# Altium PCB ArgoFC.PcbDoc (part 5 of 5)
Units mm, origin at the board's own origin, x right, y up, seen from the top; angles counter-clockwise.
Board outline 177.8 x 177.8 mm, 4 copper layers (Top Layer, GND Plane, PWR Plane, Bottom Layer), stack 0.603 mm thick; 373 components, 236 nets, 1289 pads, 686 vias.
Unrouted connection lines stored in the file: 16.
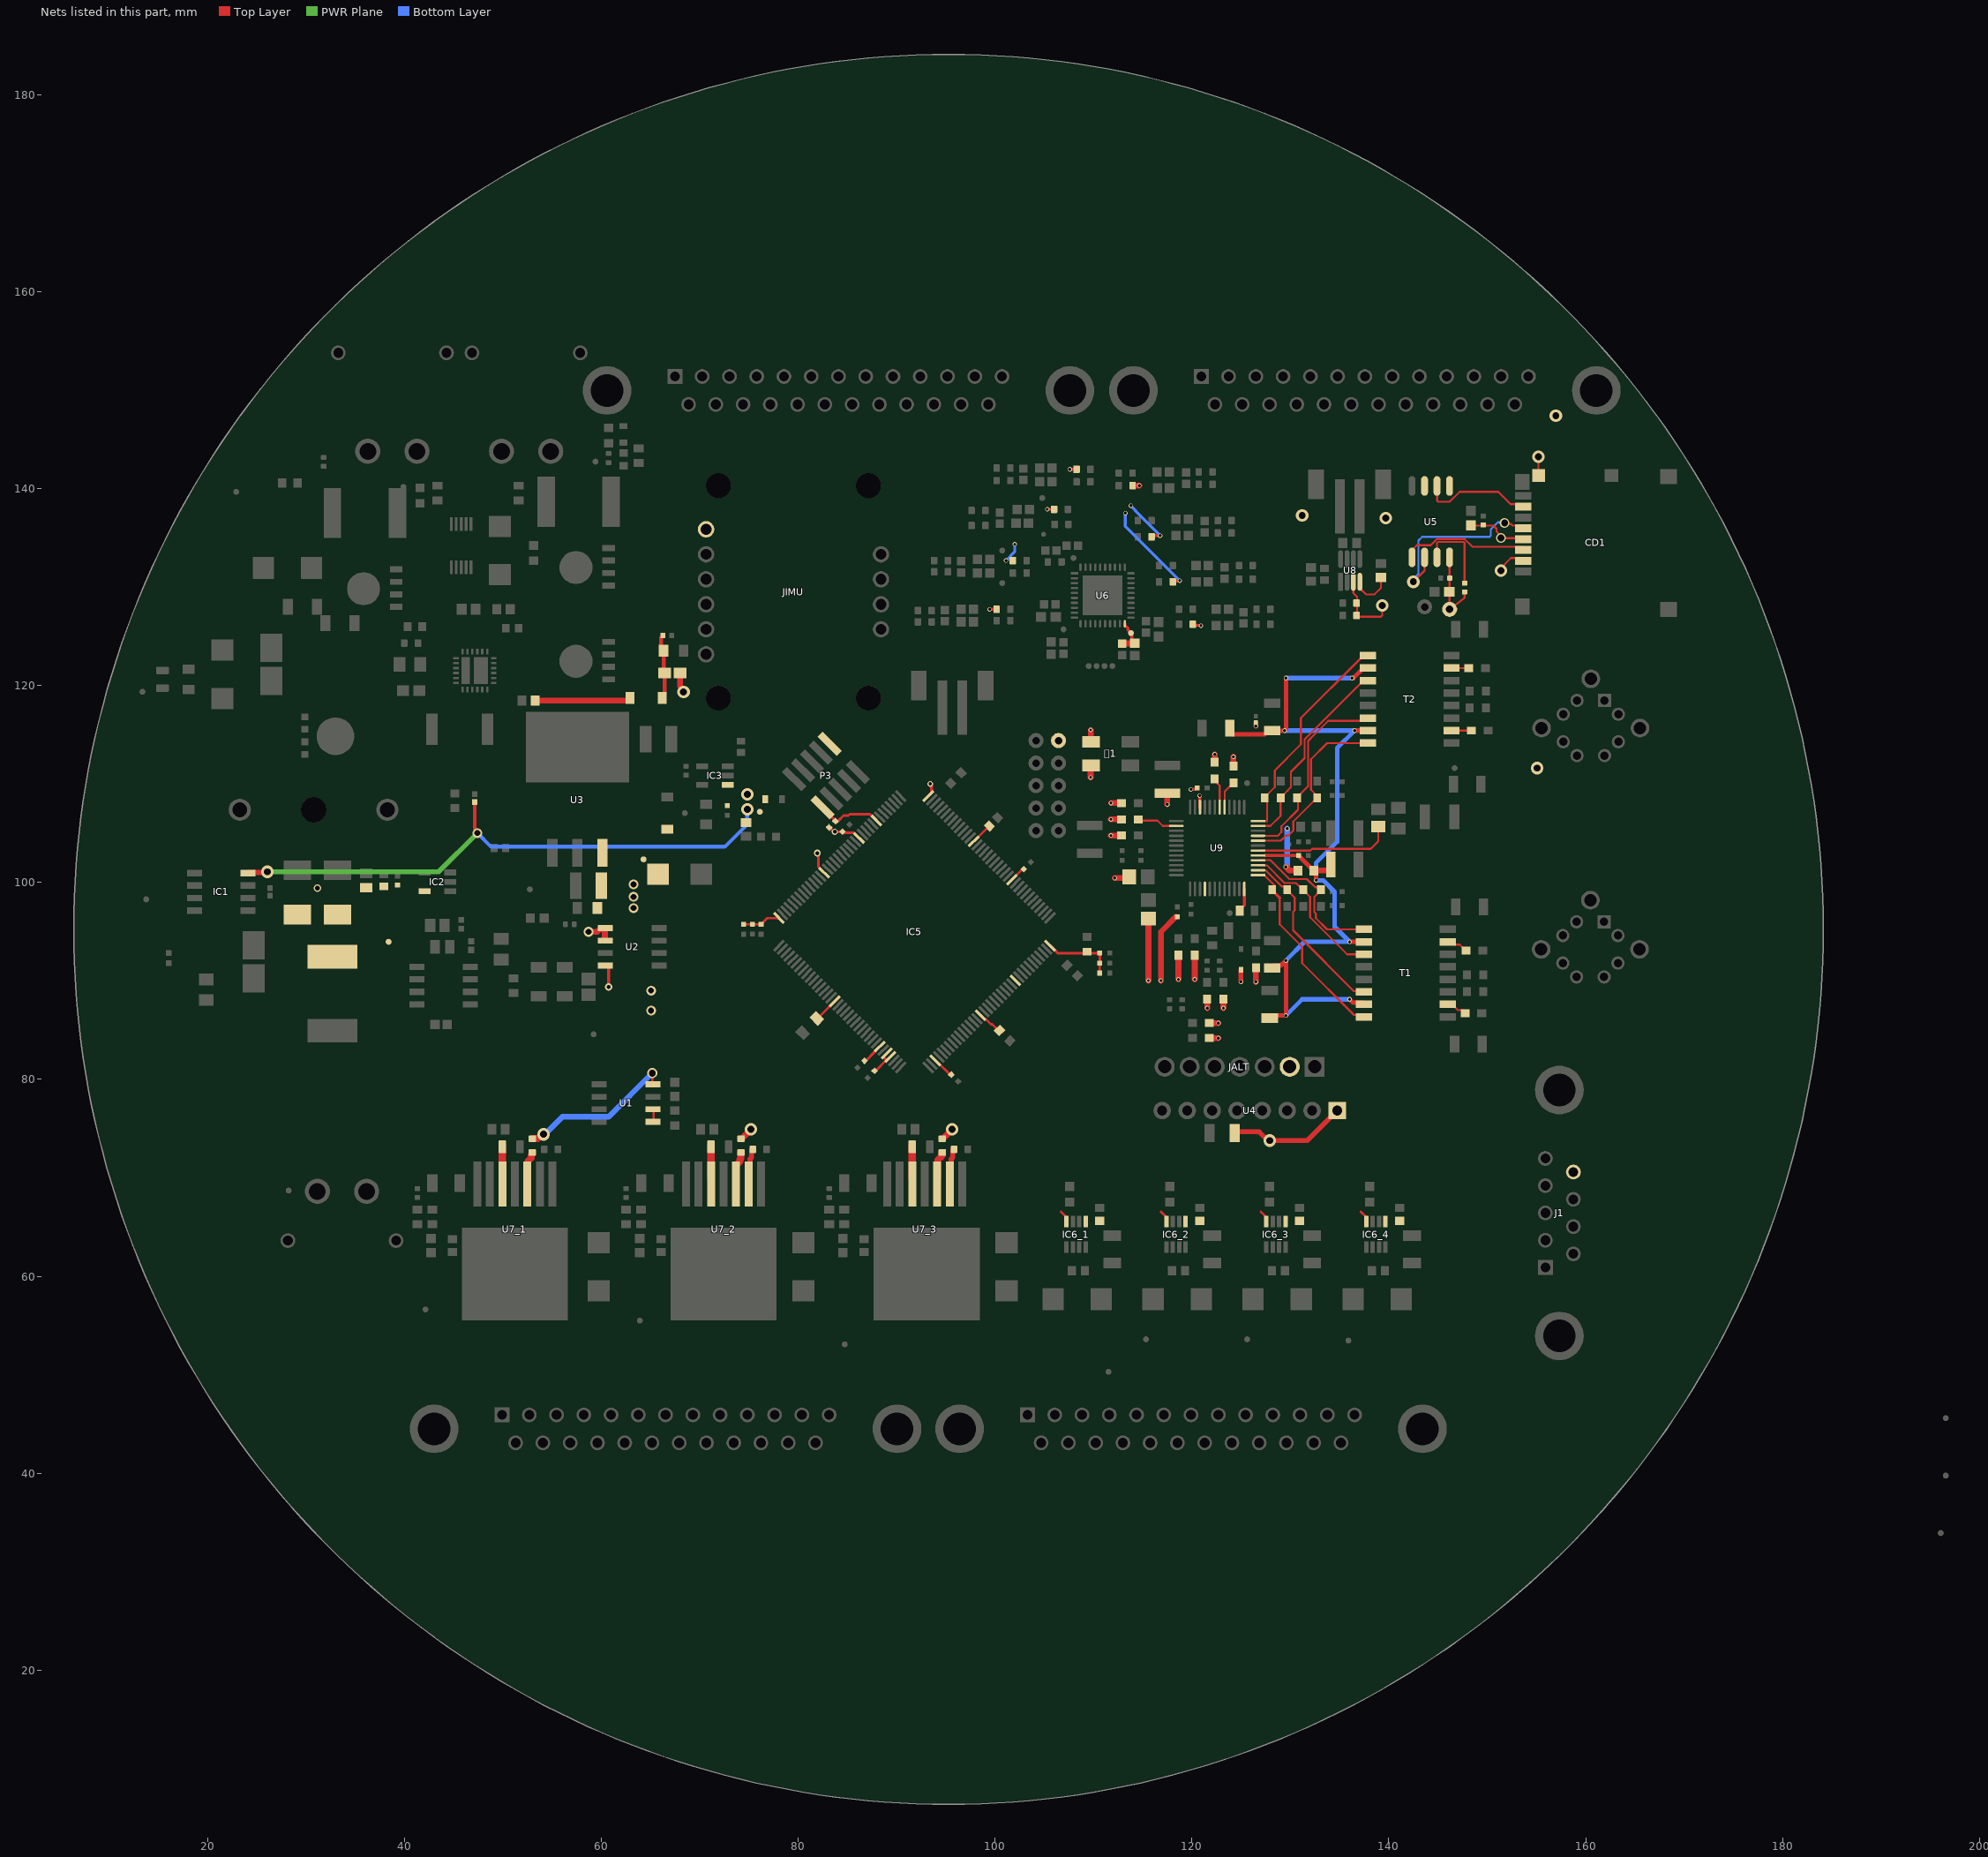
[diagram p6: the nets of this part, all layers, seen from the top]

## Via types
v1: diameter 0.5, hole 0.25, Top Layer to Bottom Layer, 327 vias
v2: diameter 0.45, hole 0.3, Top Layer to Bottom Layer, 147 vias
v3: diameter 1.27, hole 0.711, Top Layer to Bottom Layer, 80 vias
v4: diameter 1, hole 0.6, Top Layer to Bottom Layer, 28 vias
v5: diameter 1, hole 0.7, Top Layer to Bottom Layer, 21 vias
v6: diameter 0.75, hole 0.5, Top Layer to Bottom Layer, 17 vias
v7: diameter 0.5, hole 0.3, Top Layer to Bottom Layer, 15 vias
v8: diameter 0.7, hole 0.4, Top Layer to Bottom Layer, 14 vias
v9: diameter 0.75, hole 0.4, Top Layer to Bottom Layer, 12 vias
v10: diameter 0.6, hole 0.35, Top Layer to Bottom Layer, 7 vias
v11: diameter 0.6, hole 0.3, Top Layer to Bottom Layer, 5 vias
v12: diameter 0.7, hole 0.5, Top Layer to Bottom Layer, 3 vias
v13: diameter 0.6, hole 0.4, Top Layer to Bottom Layer, 2 vias
v14: diameter 2, hole 1.2, Top Layer to Bottom Layer, 2 vias
v15: diameter 7.62, hole 7.62, Top Layer to Bottom Layer, 2 vias
v16: diameter 1, hole 0.5, Top Layer to Bottom Layer, 1 vias
v17: diameter 0.711, hole 0.711, Top Layer to Bottom Layer, 1 vias
v18: diameter 1, hole 0.711, Top Layer to Bottom Layer, 1 vias
v19: diameter 0.3, hole 0.2, Top Layer to Bottom Layer, 1 vias

## Nets (pads, with @x,y where several pads share a name; then routed paths per layer and width w, separated by ;. In a path a pad name is that pad's centre, name@x,y a point inside that pad or via, vN(x,y) a via of type N, cw(c..) or ccw(c..) an arc to the next point about the centre after c; other vN are vias at no path point) (continued)
NetR64_2_2: R64_2.2 U7_2.2 | length 3.4
  Top Layer w0.5: U7_2.2@75.08,69.522 75.08,71.905 75.242,72.067 R64_2.2@75.242,72.898
NetR64_3_2: R64_3.2 U7_3.2 | length 3.4
  Top Layer w0.5: U7_3.2@95.527,69.522 95.527,71.905 95.689,72.067 R64_3.2@95.689,72.898
NetR65_1_2: R65_1.2 U7_1.3 | length 3.6
  Top Layer w0.254: U7_1.3@52.451,68.834 U7_1.3@52.451,69.372
  Top Layer w0.7: U7_1.3@52.451,69.372 52.501,69.422 52.501,71.678 52.832,72.009 R65_1.2@52.832,72.26
NetR65_2_2: R65_2.2 U7_2.3 | length 3.4
  Top Layer w0.7: U7_2.3@73.66,69.372 73.66,71.272 74.053,71.665 74.053,71.87 74.138,71.955 74.138,72.559 74.148,72.559 R65_2.2@74.168,72.579
NetR65_3_2: R65_3.2 U7_3.3 | length 2.8
  Top Layer w0.7: U7_3.3@94.107,69.977 94.157,70.027 94.157,71.805 94.585,72.233 94.585,72.559 94.595,72.559 R65_3.2@94.615,72.579
NetR66_1_2: R66_1.2 U7_1.5 | length 3.3
  Top Layer w0.75: U7_1.5@49.911,69.977 R66_1.2@49.911,73.279
NetR66_2_2: R66_2.2 U7_2.5 | length 3.3
  Top Layer w0.75: U7_2.5@71.12,69.977 R66_2.2@71.12,73.279
NetR66_3_2: R66_3.2 U7_3.5 | length 3.3
  Top Layer w0.75: U7_3.5@91.567,69.977 R66_3.2@91.567,73.279
NetR69_2: R69.2 U8.4 | length 4.4
  Top Layer w0.2: U8.4@137.048,130.556 137.048,129.906 137.668,129.286 138.557,129.286 139.192,129.921 R69.2@139.192,130.999
NetR74_1: R74.1 U9.48 | length 2.1
  Top Layer w0.3: R74.1@125.007,97.409 125.305,97.707 U9.48@125.305,99.354
NetR75_1: R75.1 U9.6 | length 13.3
  Top Layer w0.2: U9.6@126.96,103.255 132.027,103.255 132.206,103.434 138.162,103.434 138.938,104.21 R75.1@138.938,105.156
NetR76_1: R76.1 T1.1 U9.4 | length 16
  Top Layer w0.2: U9.4@126.931,102.284 127.967,102.284 129.892,100.359 131.67,100.359 132.513,99.516 132.885,99.516 R76.1@133.096,99.304 ; R76.1@132.887,99.016 132.419,98.548 132.419,97.01 132.588,96.841 132.588,96.393 133.731,95.25 T1.1@137.477,95.25
  Top Layer w0.3: R76.1@132.887,99.016 133.096,99.225 R76.1@133.096,99.275
NetR77_1: R77.1 T1.6 U9.2 | length 17.3
  Top Layer w0.2: U9.2@126.714,101.247 127.48,101.247 129.102,99.625 R77.1@129.367,99.625 ; R77.1@129.667,99.225 130.429,98.463 130.429,97.166 130.267,97.004 130.267,95.158 130.81,94.615 136.469,88.956 136.752,88.956 136.752,88.673 136.799,88.626 T1.6@136.758,88.626
  Top Layer w0.3: R77.1@129.667,99.225 R77.1@129.667,99.275
NetR78_1: R78.1 T1.8 U9.1 | length 19.4
  Top Layer w0.2: U9.1@126.706,100.755 127.34,100.755 128.397,99.698 R78.1@128.397,99.695 ; 128.905,98.463 128.905,95.758 131.191,93.472 131.191,91.821 136.469,86.543 136.752,86.543 136.842,86.453 136.842,86.17 137.125,86.17 T1.8@137.215,86.08
  Top Layer w0.3: R78.1@128.143,99.225 128.905,98.463
NetR79_1: R79.1 T1.3 U9.3 | length 14.7
  Top Layer w0.2: U9.3@126.706,101.755 127.607,101.755 129.41,99.952 130.553,99.952 R79.1@130.937,99.568 ; R79.1@131.318,99.225 131.995,98.548 131.995,96.478 135.763,92.71 T1.3@136.906,92.71
  Top Layer w0.3: R79.1@131.318,99.225 R79.1@131.318,99.275
NetR82_2: R82.2 U9.18 | length 1.8
  Top Layer w0.2: 122.592,110.052 122.601,110.052 122.809,109.844 U9.18@122.809,108.331
NetR83_2: R83.2 U9.17 | length 1.7
  Top Layer w0.2: U9.17@123.317,108.331 123.317,109.259 R83.2@123.856,109.798
NetR84_1: R84.1 T1.10 | length 2
  Top Layer w0.2: T1.10@145.987,87.63 146.432,87.63 147.021,87.041 147.528,87.041 R84.1@147.701,86.868
NetR86_1: R86.1 T1.15 | length 1.8
  Top Layer w0.2: T1.15@146.558,93.98 146.558,93.854 146.712,93.7 147.208,93.7 147.817,93.091 R86.1@147.867,93.091
NetR89_1: R89.1 T2.6 U9.9 | length 19.1
  Top Layer w0.2: U9.9@126.706,104.755 128.725,104.755 129.088,105.118 129.088,105.72 130.764,107.396 R89.1@130.764,108.412 ; R89.1@130.683,108.674 131.791,109.782 131.791,114.392 132.408,115.009 ; 132.347,114.948 133.832,116.433 137.133,116.433 137.16,116.46 T2.6@137.16,116.586
NetR90_1: R90.1 T2.8 U9.8 | length 19
  Top Layer w0.2: U9.8@126.706,104.255 129.02,104.255 129.54,104.775 129.794,104.775 130.302,105.283 130.302,106.211 132.365,108.274 132.415,108.274 132.715,108.574 R90.1@132.715,108.624 ; R90.1@132.842,108.674 132.08,109.436 132.08,112.522 133.731,114.173 T2.8@137.858,114.173
NetR91_1: R91.1 T2.1 U9.12 | length 20.6
  Top Layer w0.2: U9.12@127.341,106.255 127.615,106.255 ; R91.1@127.381,108.674 128.405,109.698 128.405,111.387 131.064,114.046 131.064,116.713 T2.1@137.133,122.782 ; 127.635,106.275 R91.1@127.635,108.37 ; T2.1@137.133,122.783 T2.1@137.159,122.809
NetR92_1: R92.1 T2.3 U9.11 | length 18.4
  Top Layer w0.2: U9.11@127.341,105.755 127.975,105.755 128.986,106.766 R92.1@128.986,108.274 ; R92.1@129.351,108.974 129.715,109.338 ; 129.715,109.357 130.056,109.698 130.056,111.26 131.445,112.649 131.445,114.555 137.287,120.397 T2.3@137.287,120.523
NetR93_2: R93.2 U9.26 | length 4.3
  Top Layer w0.2: R93.2@114.33,106.299 116.487,106.299 117.031,105.755 U9.26@118.404,105.755
NetR98_1: R98.1 T2.10 | length 1.6
  Top Layer w0.2: T2.10@146.812,115.443 R98.1@148.375,115.443
NetR99_1: R99.1 T2.15 | length 1.7
  Top Layer w0.2: T2.15@146.368,121.793 R99.1@148.082,121.793
Nfault1: IC6_1.4 | length 0.7
  Top Layer w0.254: 106.68,66.548 IC6_1.4@107.188,66.04
Nfault2: IC6_2.4 | length 0.7
  Top Layer w0.254: 116.84,66.548 IC6_2.4@117.348,66.04
Nfault3: IC6_3.4 | length 0.7
  Top Layer w0.254: 127,66.548 IC6_3.4@127.508,66.04
Nfault4: IC6_4.4 | length 0.7
  Top Layer w0.254: 137.16,66.548 IC6_4.4@137.668,66.04
NRST: IC5.116 P3.10 R15.1 | length 6.1
  Top Layer w0.254: P3.10@82.447,107.636 82.447,107.591 83.739,106.299 83.784,106.299 83.864,106.219 83.949,106.219 84.032,106.301 84.076,106.301 84.582,106.807 85.09,106.807 85.217,106.934 87.249,106.934 IC5.116@87.503,106.68
REG_SUPPLY_5V: C9.1 C12.1 C16.2 C17.2 C18.1 C19.1 D3.1 D4.2 IC2.5 L1.2 Rpl1.2 TP3.1 TP7.1 U3.3
  other v4: 63.246,97.409 63.246,98.552 63.246,99.822
  other v6: 31.115,99.441
SD_DET_3.3V: CD1.9 | length 1.6
  Top Layer w0.2: CD1.9@155.067,141.732 155.194,141.859 v3(155.194,143.256)
SD_Hold: Rhold1.2 U5.7 | length 8.4
  Top Layer w0.2: U5.7@144.898,133.046 144.898,134.503 145.015,134.62 147.584,134.62 147.701,134.503 Rhold1.2@147.701,130.429
SDCIO: U5.3
SPI3_CS0_3.3V: U5.1
SPI3_CS1_3.3V: CD1.2 | length 2.9
  Top Layer w0.2: v3(151.384,131.699) 151.384,131.953 152.4,132.969 CD1.2@153.651,132.969
SPI3_MISO_3.3V: CD1.7 U5.2 | length 11.2
  Top Layer w0.2: U5.2@144.907,140.208 144.907,138.801 145.024,138.684 146.177,138.684 147.193,139.7 151.13,139.7 152.383,138.447 153.543,138.447 CD1.7@153.651,138.447 ; CD1.7@153.543,138.43 CD1.7@153.651,138.43
SPI3_MOSI_3.3V: CD1.3 U5.5 | length 13.3
  Top Layer w0.2: U5.5@142.367,132.969 142.367,133.783 142.857,134.273 144.26,134.273 144.895,134.909 147.704,134.909 148.5,134.112 153.67,134.112 CD1.3@153.924,133.858
SPI3_SCLK_3.3V: CD1.5 U5.6 | length 18.5
  Top Layer w0.2: v3(142.494,130.556) 143.637,131.699 U5.6@143.637,132.969 ; v5(151.765,136.525) 151.856,136.434 152.406,136.434 152.569,136.271 CD1.5@152.908,136.271
  Bottom Layer w0.2: v3(142.494,130.556) 142.494,130.846 143.002,131.354 143.002,134.747 143.383,135.128 150.251,135.128 150.368,135.245 150.368,135.89 151.082,136.604 151.686,136.604 v5(151.765,136.525)
STM32VDD: 1.1 1.4 C2.1 C25.1 C26.1 C27.1 C28.1 C29.1 C30.1 C31.1 C32.1 C33.1 C34.1 C35.1 C36.1 C37.1 C38.1 C39.1 C40.1 C48.1 C49.1 C50.1 C51.1 C52_1.2 C52_2.2 C52_3.2 C52_4.2 C61.1 C62.1 C92.1 C93.1 C106.2 C107.1 C108.1 C121.2 CD1.4 D2.2 D5.1 D14.2 FB1.1 IC1.8 IC3.1 IC5.17 IC5.30 IC5.32 IC5.33 IC5.39 IC5.52 IC5.62 IC5.72 IC5.84 IC5.95 IC5.108 IC5.121 IC5.131 IC5.144 IC6_1.1 IC6_2.1 IC6_3.1 IC6_4.1 J1.9 JALT.2 JIMU.1 P3.1 pad.7 pad.9 R13.1 R15.2 R16.1 R24.2 R25.2 R26.2 R27.2 R28.2 R29.2 R30.2 R31.2 R65_1.1 R65_2.1 R65_3.1 R72.1 R73.2 R80.2 R81.2 R82.1 R83.1 R85.1 R93.1 R94.1 R96.1 R97.1 R101.1 R103.1 R104.1 Rhold1.1 Rpg1.1 RT1.2 TP5.1 TP19.1 U1.4 U2.4 U4.1 U5.8 U6.20 U8.3 U9.22 U9.40 | length 223.5
  Top Layer w0.2: 1.1@109.696,111.868 1.1@109.728,111.9 ; v2(109.696,115.513) v2@109.728,115.481 ; R73.2@113.477,100.457 R73.2@113.604,100.584 ; R83.1@124.201,111.853 R83.1@124.206,111.848 ; U8.3@136.398,130.556 136.398,129.413 136.779,129.032 C93.1@136.779,127 ; C93.1@136.685,127 139.202,127 139.319,127.117 v3(139.319,128.143) ; C49.1@146.05,129.413 146.168,129.531 U5.8@146.168,133.046 ; C49.1@146.153,129.286 146.177,129.262 pad.7@146.177,127.762 147.701,128.905 Rhold1.1@147.701,129.529 ; C51.1@148.336,136.283 148.359,136.26 150.633,136.26 150.948,135.945 150.948,135.653 151.384,135.217 v5(151.384,135.001) 153.505,135.001 CD1.4@153.651,135.147
  Top Layer w0.254: 47.117,105.485 47.371,105.231 v4(47.371,105.029) ; U1.4@65.151,79.502 v18@65.151,80.264 ; C36.1@74.422,95.758 76.2,95.758 76.835,96.393 IC5.144@77.978,96.393 ; C38.1@81.407,86.222 81.513,86.328 82.084,86.328 84.074,88.318 IC5.17@84.074,88.392 ; v8@82.042,102.997 82.042,101.6 IC5.131@82.423,101.219 ; R15.2@83.185,105.537 v13@83.566,105.156 ; v13(83.693,105.156) 84.328,105.156 C29.1@84.455,105.283 ; C29.1@84.416,105.068 85.589,105.068 86.119,104.537 IC5.121@86.152,104.537 ; C34.1@86.804,81.852 IC5.30@87.884,82.931 ; C33.1@87.884,80.899 88.9,81.915 88.9,82.042 IC5.32@88.646,82.296 ; IC5.39@94.234,81.661 95.377,80.518 C26.1@95.504,80.518 ; IC5.95@98.044,104.394 C39.1@99.377,105.727 ; IC5.52@98.509,86.523 98.924,86.108 99.06,86.108 99.557,85.611 99.682,85.611 C40.1@100.487,84.806 ; IC5.84@101.981,100.584 102.743,101.346 C25.1@102.87,101.346 ; C32.1@110.617,90.678 110.617,91.44 ; 110.625,91.567 C27.1@110.625,92.837
  Top Layer w0.28: IC5.72@105.58,93.594 106.337,92.837 C37.1@109.347,92.837 ; C37.1@109.347,92.976 109.486,92.837 110.515,92.837 C27.1@110.617,92.735
  Top Layer w0.3: IC5.108@93.368,108.943 93.621,109.196 93.518,109.299 93.518,109.82 93.397,109.941 v10(93.397,110.022) ; v2(99.441,127.762) R25.2@100.138,127.762 ; v2(105.283,137.922) 105.918,137.922 R31.2@106.045,138.049 ; v2(107.569,141.986) R30.2@108.266,141.986 ; U6.20@113.166,126.295 113.166,126.095 113.197,126.065 113.275,126.065 113.481,125.859 113.481,125.675 113.803,125.352 113.803,125.257 113.849,125.21 113.849,125.079 113.896,125.033 113.896,124.575 C62.1@114.173,124.298 ; R28.2@116.058,135.255 v2(116.755,135.255) ; R27.2@118.048,130.556 118.146,130.654 118.716,130.654 v2(118.745,130.683) ; v2(119.888,109.474) 120.431,109.474 120.523,109.566 C108.1@120.523,109.574 ; R26.2@120.162,126.336 120.162,126.238 120.26,126.14 120.875,126.14 v2(120.904,126.111) ; v2(120.777,108.839) 120.805,108.811 U9.22@120.805,107.656
  Top Layer w0.35: 47.117,105.485 C2.1@47.117,108.195 ; v9(60.706,89.408) U2.4@60.706,91.554
  Top Layer w0.5: IC1.8@24.048,100.965 24.112,101.028 25.971,101.028 v3(26.035,101.092) ; R16.1@124.535,74.755 124.613,74.676 126.819,74.676 127.708,73.787 131.699,73.787 134.797,76.885 U4.1@134.797,77.139 ; v2(124.968,89.916) D14.2@124.968,91.147 ; v2(126.492,115.894) C121.2@126.492,116.256
  Top Layer w0.6: Rpg1.1@53.253,118.491 D2.2@62.865,118.491 ; RT1.2@67.974,121.285 67.974,119.913 68.326,119.561 v3(68.326,119.38) ; v2(109.696,110.687) 1.1@109.696,111.868 ; 1.4@109.728,114.3 v2@109.728,115.481 ; v2(111.76,104.775) R85.1@112.881,104.775 ; v2(111.76,106.426) R93.1@112.965,106.426 ; v2@111.799,108.077 R81.2@112.776,108.077 ; v2(112.141,100.457) R73.2@113.477,100.457 ; C61.1@112.903,124.273 112.928,124.298 C62.1@114.173,124.298 ; R29.2@113.954,140.335 v2(114.634,140.335) ; v2(115.57,90.043) R80.2@115.57,96.266 ; v2(116.84,90.043) 116.84,94.996 C107.1@118.372,96.528 ; v2(117.475,107.95) C106.2@117.475,109.09 ; v2(118.618,90.17) R94.1@118.618,92.622 ; v2(120.269,90.17) R96.1@120.269,92.622 ; v2(121.539,87.249) R104.1@121.539,88.177 ; R101.1@121.754,84.201 v2(122.682,84.201) ; R97.1@121.754,85.725 v2(122.682,85.725) ; R82.1@122.301,112.229 v2(122.301,113.03) ; v2(123.19,87.249) R103.1@123.19,88.177 ; R83.1@124.201,111.853 124.206,111.859 v2(124.206,112.775) ; v2(126.492,89.916) R72.1@126.492,91.352 ; v2(129.54,101.6) 129.921,101.219 FB1.1@130.772,101.219
  Top Layer w0.65: R65_2.1@74.231,73.977 v3@75.184,74.93 ; R65_3.1@94.742,74.041 v3@95.631,74.93
  Top Layer w0.7: R65_1.1@52.959,73.979 53.505,73.979 53.948,74.422 v3@54.229,74.422
  PWR Plane w0.5: v3(26.035,101.092) 43.434,101.092 v4(47.371,105.029)
  Bottom Layer w0.3: v2@101.141,132.764 101.981,133.604 v2(101.981,134.366) ; v2(113.228,137.541) 113.228,136.2 v2(118.745,130.683) ; v2(113.792,138.303) 113.792,138.262 114.248,137.806 114.248,137.762 v2(116.755,135.255)
  Bottom Layer w0.4: v4(47.371,105.029) 48.768,103.632 72.517,103.632 74.803,105.918 v3(74.803,107.442)
  Bottom Layer w0.6: v3@54.229,74.422 56.007,76.2 60.706,76.2 v18(65.151,80.645) ; v2(129.54,101.6) 129.667,101.727 v2@129.667,105.283 ; v2@129.668,105.284 v2(129.668,105.481)
  other v2: 111.76,108.077 101.092,132.715
  other v3: 127.889,73.787 54.102,74.422 75.168,74.93 95.615,74.93 74.803,108.966 155.067,111.633 139.7,137.033 131.191,137.287 156.972,147.447
  other v4: 65.024,86.995 65.024,89.027
  other v8: 81.915,102.997
Temp1: C7.1 D2.1 R5.2 RT1.1 | length 6.3
  Top Layer w0.254: RT1.1@66.294,121.398 RT1.1@66.407,121.285
  Top Layer w0.4: R5.2@66.225,125.095 66.225,125.07 66.04,124.885 66.04,123.816 C7.1@66.285,123.571 ; D2.1@66.294,119.205 66.407,119.318 RT1.1@66.407,121.285 ; RT1.1@66.294,121.398 C7.1@66.294,123.698
VDDA3.3V_CLEAN: C100.2 C101.1 C109.2 C110.2 C111.2 C114.2 FB1.2 T1.2 T1.7 T2.2 T2.7 U9.5 | length 85.9
  Top Layer w0.3: U9.5@127.381,102.743 C101.1@130.818,102.743
  Top Layer w0.45: C111.2@123.952,115.316 123.952,115.198 124.078,115.072 124.332,115.072 124.342,115.062 127.39,115.062 127.768,115.44 129.41,115.44 v2(129.413,115.443) 129.54,115.57 v2(129.54,120.777) ; C110.2@128.27,86.49 129.537,86.49 v2(129.54,86.487) v2(129.54,92.075) 129.025,91.56 128.39,91.56 C109.2@128.27,91.44 ; C101.1@130.818,102.743 132.067,101.494 132.147,101.494 132.207,101.434 FB1.2@132.207,101.346 ; FB1.2@132.372,101.219 132.588,101.003 132.588,100.26 v2(132.616,100.231) ; v2(136.017,88.138) 136.37,87.785 137.322,87.785 T1.7@137.477,87.63 ; v2(136.017,93.98) T1.2@136.779,93.98 ; v2(136.271,120.777) 136.397,120.777 137.413,121.793 T2.2@137.858,121.793 ; v2(136.525,115.443) T2.7@137.16,115.443
  Top Layer w0.6: FB1.2@132.372,101.219 C100.2@133.858,101.219
  Bottom Layer w0.45: v2(129.413,115.443) v2(136.525,115.443) 134.747,113.665 134.747,104.14 132.588,101.981 v2@132.588,100.203 ; v2(129.54,86.487) 131.191,88.138 v2(136.017,88.138) ; v2(129.54,92.075) 131.445,93.98 v2(136.017,93.98) 134.493,95.504 134.493,99.06 133.322,100.231 v2(132.616,100.231) ; v2(129.54,120.777) v2(136.271,120.777)
VM5V: U2.1 U2.2 | length 3
  Top Layer w0.6: v4(58.674,94.996) 59.568,94.996 59.919,95.347 59.919,95.377 U2.1@60.325,95.377 ; U2.2@60.325,94.234 U2.1@60.325,95.377 ; U2.1@60.379,95.377 U2.1@60.325,95.377
VM24: U1.1 U1.2 | length 1.5
  Top Layer w0.254: U1.1@65.278,75.565 U1.2@65.278,77.089
pads on no net: BMS1.1 BMS1.5 CD1.1 CD1.8 CD1.10 IC5.1 IC5.2 IC5.3 IC5.4 IC5.5 IC5.6 IC5.7 IC5.8 IC5.9 IC5.10 IC5.11 IC5.12 IC5.13 IC5.14 IC5.15 IC5.18 IC5.19 IC5.20 IC5.21 IC5.22 IC5.23 IC5.24 IC5.25 IC5.26 IC5.27 IC5.28 IC5.29 IC5.34 IC5.35 IC5.36 IC5.37 IC5.40 IC5.41 IC5.42 IC5.43 IC5.46 IC5.47 IC5.48 IC5.49 IC5.50 IC5.53 IC5.54 IC5.55 IC5.56 IC5.57 IC5.58 IC5.59 IC5.60 IC5.63 IC5.64 IC5.65 IC5.66 IC5.67 IC5.68 IC5.69 IC5.70 IC5.73 IC5.74 IC5.75 IC5.76 IC5.77 IC5.78 IC5.79 IC5.80 IC5.81 IC5.82 IC5.85 IC5.86 IC5.87 IC5.88 IC5.89 IC5.90 IC5.91 IC5.92 IC5.93 IC5.94 IC5.96 IC5.97 IC5.98 IC5.99 IC5.100 IC5.101 IC5.102 IC5.111 IC5.112 IC5.113 IC5.114 IC5.115 IC5.117 IC5.118 IC5.119 IC5.122 IC5.123 IC5.124 IC5.125 IC5.129 IC5.130 IC5.132 IC5.134 IC5.135 IC5.136 IC5.137 IC5.138 IC5.139 IC5.140 IC5.141 IC5.142 IC5.143 J1.4 J1.8 J2.3 J2.4 J3.3 J3.4 J4.3 J4.4 JALT.3 JALT.6 JALT.7 JIMU.2 JIMU.7 JIMU.8 JIMU.10 JIMU.MH1 JIMU.MH2 JIMU.MH3 JIMU.MH4 JPyro1.3 JPyro1.8 JPyro1.18 JPyro1.23 JValve1.15 JValve1.17 JValve1.24 P1.MP1 P1.MP2 P2.MP1 P2.MP2 P3.7 T1.4 T1.5 T1.12 T1.13 T2.4 T2.5 T2.12 T2.13 U1.5 U1.6 U1.7 U2.5 U2.6 U2.7 U4.2 U4.5 U6.1 U6.11 U6.12 U6.13 U6.18 U6.19 U6.23 U6.24 U6.25 U6.38 U8.5 U8.8 U9.13 U9.15 U9.24 U9.27 U9.30 U9.33 U9.34 XF1.MH1
copper on no net: | length 3.9
  Top Layer w0.2: 93.558,131.318 93.788,131.548 93.788,131.572 ; 145.288,130.912 145.288,130.937
  Top Layer w0.35: 67.437,76.581 67.437,76.661
  Top Layer w0.4: 65.224,78.232 67.31,78.232 ; 67.437,76.835 67.437,78.163
  other v15: 165,60 30,75

## Polygon pours and split planes (outlines as drawn)
LOAD_2 on Top Layer "LOAD_2_L01_P245" (solid, pour order 245): 117.729,63.627 118.364,63.627 118.364,49.53 114.935,49.53 114.935,59.563 116.078,60.706 117.729,62.357
NetC3_1 on Top Layer "NETC3_1_L01_P142" (solid, remove dead copper, pour order 142): 29.591,128.778 31.623,128.778 34.036,125.446 34.036,123.317 31.75,123.317 29.591,125.476
NetBMS1_6 on Top Layer "NETBMS1_6_L01_P143" (solid, remove dead copper, pour order 143): 38.481,133.223 44.831,133.223 44.831,131.318 38.481,131.318
NetBMS1_7 on Top Layer "NETBMS1_7_L01_P144" (solid, pour order 144): 45.466,132.715 45.466,130.556 44.45,129.54 43.815,129.54 42.291,131.064 45.085,131.064 45.085,132.715
NetBMS1_8 on Top Layer "NETBMS1_8_L01_P147" (solid, pour order 147): 38.481,130.937 41.783,130.937 43.561,129.159 43.561,127.889 42.926,127.254 38.481,127.254
NetIC7_6 on Top Layer "NETIC7_6_L01_P149" (solid, remove dead copper, pour order 149): 49.911,128.27 49.911,127.254 45.339,127.254 45.339,128.778 45.72,129.159 49.2,129.159
NetBMS1_8 on Top Layer "NETBMS1_8_L01_P150" (solid, remove dead copper, pour order 150): 46.99,128.27 46.99,120.269 47.117,120.142 48.26,120.142 48.514,120.396 48.514,127 47.244,128.27
NetIC7_6 on Top Layer "NETIC7_6_L01_P151" (solid, remove dead copper, pour order 151): 45.974,123.19 45.974,126.746 46.482,127.254 46.482,128.905 45.466,128.905 43.307,126.746 43.307,125.603 45.72,123.19
GND on Top Layer "GND_L01_P152" (solid, remove dead copper, pour order 152): 46.106,123.063 46.868,123.063 46.868,126.106 46.609,126.365 46.355,126.365 46.106,126.116 46.106,124.564
GND on Top Layer "GND_L01_P153" (solid, pour order 153): 41.021,126.746 37.719,126.746 37.719,118.745 38.354,118.11 40.005,118.11 40.513,118.618 40.513,124.968 41.021,125.476
NetIC7_17 on Top Layer "NETIC7_17_L01_P157" (solid, remove dead copper, pour order 157): 47.752,119.888 48.514,119.888 48.768,120.142 48.768,123.317 49.022,123.571 51.308,123.571 51.562,123.317 51.562,120.777 49.784,118.999 47.752,118.999
NetIC7_15 on Top Layer "NETIC7_15_L01_P158" (solid, pour order 158): 46.101,117.221 45.847,116.967 45.847,114.046 46.228,113.665 49.149,113.665 49.149,117.221
NetBMS1_8 on Top Layer "NETBMS1_8_L01_P159" (solid, pour order 159): 52.324,127.746 52.324,125.095 52.324,121.793 54.356,119.761 59.563,119.761 59.563,128.397 58.928,129.032 53.534,129.032
NetIC7_17 on Top Layer "NETIC7_17_L01_P160" (solid, remove dead copper, pour order 160): 30.861,117.221 30.861,112.395 32.893,110.363 36.576,110.363 36.576,117.221
GND on Top Layer "GND_L01_P170" (solid, remove dead copper, pour order 170): 22.86,98.933 26.797,98.933 26.797,92.837 26.162,92.202 22.86,92.202
REG_SUPPLY_5V on Top Layer "REG_SUPPLY_5V_L01_P171" (solid, pour order 171): 27.559,99.568 27.559,93.345 31.242,89.662 34.417,89.662 35.56,90.805 35.56,99.568
REG_SUPPLY_5V on Top Layer "REG_SUPPLY_5V_L01_P172" (solid, remove dead copper, pour order 172): 42.782,99.949 42.782,97.802 35.299,90.52 34.036,98.85 35.364,99.949
GND on Top Layer "GND_L01_P179" (solid, pour order 179): 44.831,120.65 44.831,120.904 45.593,120.904 45.72,121.031 45.72,122.809 45.847,122.936 46.228,122.936 46.228,123.825 46.99,123.825 46.99,123.19 46.609,122.809 46.609,118.872 46.228,118.872 46.228,120.015 45.593,120.65
NetIC4_3 on Top Layer "NETIC4_3_L01_P194" (solid, remove dead copper, pour order 194): 49.022,92.71 49.022,91.821 47.752,90.551 45.974,90.551 45.974,89.662 51.689,89.662 51.689,91.077 50.546,92.71
5V on Top Layer "5V_L01_P195" (solid, remove dead copper, pour order 195): 43.688,99.441 50.038,99.441 50.419,99.822 53.213,99.822 53.213,95.504 48.006,95.504 46.482,97.028 43.942,97.028 43.688,97.282
NetIC2_4 on Top Layer "NETIC2_4_L01_P196" (solid, remove dead copper, pour order 196): 39.116,100.33 38.862,100.584 38.862,103.124 40.005,104.267 42.545,104.267 43.053,103.759 43.053,100.711 42.672,100.33
NetCg1_1 on Top Layer "NETCG1_1_L01_P197" (solid, remove dead copper, pour order 197): 37.084,116.76 37.973,117.649 43.815,117.649 43.815,114.728 46.355,112.188 46.355,108.886 38.354,108.886 37.084,110.156
NetC16_1 on Top Layer "NETC16_1_L01_P198" (solid, remove dead copper, pour order 198): 27.559,103.759 27.559,100.203 34.671,100.203 34.925,100.457 38.481,100.457 38.481,103.124 37.846,103.759
GND on Top Layer "GND_L01_P201" (solid, remove dead copper, pour order 201): 36.957,126.873 36.576,126.492 36.576,126.111 36.957,125.73 38.989,125.73 39.116,125.603 39.243,125.73 39.243,126.619 38.989,126.873 37.846,126.873
NetC10_1 on Top Layer "NETC10_1_L01_P280" (solid, remove dead copper, pour order 280): 51.181,106.997 51.181,109.156 51.181,117.412 63.627,117.411 65.278,115.76 65.278,106.997 57.15,106.997
GND on Top Layer "GND_L01_P281" (solid, remove dead copper, pour order 281): 49.784,101.727 49.784,104.013 53.848,104.013 54.483,104.648 55.753,104.648 55.753,101.6 55.499,101.346 54.589,101.346 54.271,101.727
NetC10_1 on Top Layer "NETC10_1_L01_P282" (solid, remove dead copper, pour order 282): 56.769,101.6 58.166,101.6 58.166,109.728 56.769,109.728
GND on Top Layer "GND_L01_P286" (solid, remove dead copper, pour order 286): 47.625,93.726 47.625,94.996 47.752,95.123 47.879,94.996 54.991,94.996 56.515,93.472 56.515,92.202 58.039,92.202 59.436,90.805 59.436,89.535 57.912,89.535 56.896,90.551 56.896,90.805 52.959,90.805 52.705,91.059 52.705,91.948 50.927,93.726
GND on Top Layer "GND_L01_P303" (solid, pour order 303): 77.978,109.22 77.978,107.823 79.883,107.823 80.137,108.077 80.137,108.839 79.756,109.22
LOAD_7 on Top Layer "LOAD_7_L01_P300" (solid, pour order 300): 95.504,51.943 95.504,49.784 103.505,41.783 106.045,41.783 107.061,42.799 107.061,46.355 102.235,51.181 102.235,51.943
LOAD_6 on Top Layer "LOAD_6_L01_P297" (solid, pour order 297): 62.865,51.785 62.865,43.942 64.801,42.006 68.422,42.006 70.255,43.839 70.255,51.785
LOAD_5 on Top Layer "LOAD_5_L01_P296" (solid, pour order 296): 45.085,51.943 45.085,47.625 50.8,41.91 54.864,41.91 55.372,42.418 55.372,44.069 55.372,51.943
NetBMS1_9 on Top Layer "NETBMS1_9_L01_P136" (solid, remove dead copper, pour order 136): 46.736,157.846 46.736,136.438 53.25,129.413 59.944,129.413 59.944,157.846
NetDQ1_2 on Top Layer "NETDQ1_2_L01_P139" (solid, remove dead copper, pour order 139): 60.076,140.843 60.076,119.761 64.008,119.761 64.892,120.645 64.892,140.843
GND on Top Layer "GND_L01_P290" (solid, remove dead copper, pour order 290): 69.977,106.426 69.977,105.41 71.501,105.41 71.501,104.775 71.882,104.394 72.644,104.394 73.025,104.775 73.025,107.061 72.39,107.061 71.882,106.553 71.882,106.426
STM32VDD on Top Layer "STM32VDD_L01_P285" (solid, pour order 285): 72.136,110.236 72.136,107.696 73.025,107.696 74.168,106.045 75.184,106.045 76.962,107.823 76.962,109.093 75.819,110.236
REG_SUPPLY_5V on Top Layer "REG_SUPPLY_5V_L01_P287" (solid, pour order 287): 59.055,104.14 59.436,104.521 66.675,104.521 66.802,104.394 66.802,99.822 63.373,96.393 59.309,96.393 59.055,96.647
NetC10_1 on Top Layer "NETC10_1_L01_P284" (solid, pour order 284): 63.373,111.125 70.739,111.125 71.374,110.49 71.374,107.442 68.961,107.442 68.453,106.934 63.373,106.934
NetC55_4_1 on Top Layer "NETC55_4_1_L01_P255" (solid, pour order 255): 141.478,61.849 141.478,60.071 140.208,58.801 140.208,56.515 142.367,56.515 143.256,57.404 143.256,61.849
NetC55_3_1 on Top Layer "NETC55_3_1_L01_P254" (solid, remove dead copper, pour order 254): 131.318,61.849 131.318,60.071 130.048,58.801 130.048,56.515 132.207,56.515 133.096,57.404 133.096,61.849
NetC55_2_1 on Top Layer "NETC55_2_1_L01_P253" (solid, pour order 253): 121.158,61.849 121.158,60.071 119.888,58.801 119.888,56.515 122.047,56.515 122.936,57.404 122.936,61.849
NetC55_1_1 on Top Layer "NETC55_1_1_L01_P252" (solid, pour order 252): 110.998,61.849 110.998,60.071 109.728,58.801 109.728,56.515 111.887,56.515 112.776,57.404 112.776,61.849
24Vin on Top Layer "24VIN_L01_P221" (solid, pour order 221): 84.074,66.294 84.074,67.818 85.979,67.818 85.979,72.136 86.487,72.644 89.408,72.644 89.662,72.39 89.662,65.659 87.63,65.659 87.249,65.278 87.249,63.373 85.725,63.373 85.725,66.04 85.471,66.294
NetR62_3_1 on Top Layer "NETR62_3_1_L01_P220" (solid, pour order 220): 85.217,65.786 85.217,63.373 83.947,63.373 82.55,64.77 82.55,65.786
NetR62_1_1 on Top Layer "NETR62_1_1_L01_P209" (solid, pour order 209): 43.307,65.659 43.307,63.5 43.18,63.373 42.164,63.373 40.767,64.77 40.767,65.659
24Vin on Top Layer "24VIN_L01_P203" (solid, remove dead copper, pour order 203): 42.291,66.167 43.434,66.167 43.815,65.786 43.815,63.373 45.339,63.373 45.339,65.278 45.72,65.659 47.752,65.659 47.752,72.517 47.371,72.898 44.577,72.898 43.942,72.263 43.942,68.072 42.291,68.072
24Vin on Top Layer "24VIN_L01_P218" (solid, pour order 218): 63.5,66.294 63.5,67.818 65.278,67.818 65.278,72.136 65.786,72.644 68.707,72.644 68.961,72.39 68.961,65.659 66.929,65.659 66.548,65.278 66.548,63.373 65.024,63.373 65.024,66.04 64.77,66.294
NetR62_2_1 on Top Layer "NETR62_2_1_L01_P217" (solid, remove dead copper, pour order 217): 61.976,65.786 61.976,64.77 63.373,63.373 64.516,63.373 64.516,65.786
REG_SUPPLY_5V on Top Layer "REG_SUPPLY_5V_L01_P274" (solid, remove dead copper, pour order 274): 61.595,103.886 63.627,105.918 67.31,105.918 67.31,104.902 64.389,101.981 64.389,101.219 61.595,101.219
LOAD_4 on Top Layer "LOAD_4_L01_P259" (solid, pour order 259): 135.255,56.388 138.684,56.388 139.954,55.118 142.367,55.118 142.621,54.864 142.621,49.53 137.541,49.53
STM32VDD on Top Layer "STM32VDD_L01_P251" (solid, remove dead copper, pour order 251): 139.446,66.167 139.446,65.024 141.351,65.024 141.605,65.278 141.605,66.167
24Vin on Top Layer "24VIN_L01_P236" (solid, remove dead copper, pour order 236): 138.811,61.214 138.811,64.008 139.573,64.77 144.272,64.77 144.272,62.992 139.573,62.992 139.573,61.214
GND on Top Layer "GND_L01_P243" (solid, remove dead copper, pour order 243): 137.922,62.357 137.922,63.881 136.017,63.881 135.509,63.373 135.509,62.484 136.017,61.976 137.541,61.976
LOAD_4 on Top Layer "LOAD_4_L01_P247" (solid, pour order 247): 138.049,63.627 138.684,63.627 138.684,49.53 135.255,49.53 135.255,59.563 136.398,60.706 138.049,62.357
LOAD_3 on Top Layer "LOAD_3_L01_P258" (solid, pour order 258): 125.095,56.388 128.524,56.388 129.794,55.118 132.207,55.118 132.461,54.864 132.461,49.53 127.381,49.53
STM32VDD on Top Layer "STM32VDD_L01_P250" (solid, remove dead copper, pour order 250): 129.286,66.167 129.286,65.024 131.191,65.024 131.445,65.278 131.445,66.167
24Vin on Top Layer "24VIN_L01_P235" (solid, remove dead copper, pour order 235): 128.651,61.214 128.651,64.008 129.413,64.77 134.112,64.77 134.112,62.992 129.413,62.992 129.413,61.214
GND on Top Layer "GND_L01_P242" (solid, remove dead copper, pour order 242): 127.762,62.357 127.762,63.881 125.857,63.881 125.349,63.373 125.349,62.484 125.857,61.976 127.381,61.976
LOAD_3 on Top Layer "LOAD_3_L01_P246" (solid, pour order 246): 127.889,63.627 128.524,63.627 128.524,49.53 125.095,49.53 125.095,59.563 126.238,60.706 127.889,62.357
LOAD_2 on Top Layer "LOAD_2_L01_P257" (solid, pour order 257): 114.935,56.388 118.364,56.388 119.634,55.118 122.047,55.118 122.301,54.864 122.301,49.53 117.221,49.53
STM32VDD on Top Layer "STM32VDD_L01_P249" (solid, remove dead copper, pour order 249): 119.126,66.167 119.126,65.024 121.031,65.024 121.285,65.278 121.285,66.167
24Vin on Top Layer "24VIN_L01_P234" (solid, remove dead copper, pour order 234): 118.491,61.214 118.491,64.008 119.253,64.77 123.952,64.77 123.952,62.992 119.253,62.992 119.253,61.214
GND on Top Layer "GND_L01_P241" (solid, remove dead copper, pour order 241): 117.602,62.357 117.602,63.881 115.697,63.881 115.189,63.373 115.189,62.484 115.697,61.976 117.221,61.976
LOAD_1 on Top Layer "LOAD_1_L01_P256" (solid, pour order 256): 104.775,56.388 108.204,56.388 109.474,55.118 111.887,55.118 112.141,54.864 112.141,49.657 104.775,49.657
LOAD_1 on Top Layer "LOAD_1_L01_P244" (solid, pour order 244): 107.569,63.627 108.204,63.627 108.204,49.657 104.775,49.657 104.775,59.563 105.918,60.706 107.569,62.357
24Vin on Top Layer "24VIN_L01_P233" (solid, remove dead copper, pour order 233): 108.331,61.214 108.331,64.008 109.093,64.77 113.792,64.77 113.792,62.992 109.093,62.992 109.093,61.214
STM32VDD on Top Layer "STM32VDD_L01_P248" (solid, remove dead copper, pour order 248): 108.966,66.167 108.966,65.024 110.871,65.024 111.125,65.278 111.125,66.167
GND on Top Layer "GND_L01_P240" (solid, remove dead copper, pour order 240): 107.442,62.357 107.442,63.881 105.537,63.881 105.029,63.373 105.029,62.484 105.537,61.976 107.061,61.976
GND on Top Layer "GND_L01_P219" (solid, remove dead copper, pour order 219): 62.103,68.834 62.103,70.104 62.357,70.358 64.516,70.358 64.516,68.58 62.357,68.58
GND on Top Layer "GND_L01_P239" (solid, remove dead copper, pour order 239): 82.75,68.834 82.75,70.104 83.004,70.358 85.163,70.358 85.163,68.58 83.004,68.58
GND on Top Layer "GND_L01_P238" (solid, pour order 238): 91.44,75.438 93.599,75.438 93.853,75.184 93.853,72.517 92.964,72.517 92.964,73.787 92.329,74.422 91.44,74.422
GND on Top Layer "GND_L01_P237" (solid, pour order 237): 70.993,75.438 73.152,75.438 73.406,75.184 73.406,72.517 72.517,72.517 72.517,73.787 71.882,74.422 70.993,74.422
NetC3_1 on Top Layer "NETC3_1_L01_P141" (solid, remove dead copper, pour order 141): 29.591,125.476 37.084,125.476 37.084,118.364 36.195,117.475 31.623,117.475 31.623,113.665 11.049,113.665 11.049,117.043 12.515,120.269 22.225,120.269 23.876,121.92 29.591,121.92
LOAD_7 on Top Layer "LOAD_7_L01_P215" (solid, remove dead copper, pour order 215): 87.576,62.865 84.147,62.865 83.512,62.23 83.512,50.292 84.274,49.53 102.562,49.53 103.197,50.165 103.197,60.706 102.943,60.96 98.298,60.96 98.298,64.897 87.576,64.897
LOAD_6 on Top Layer "LOAD_6_L01_P214" (solid, pour order 214): 63.373,62.865 62.865,62.357 62.865,50.165 63.5,49.53 81.788,49.53 82.55,50.292 82.55,60.833 82.296,61.087 77.851,61.087 77.851,64.897 66.929,64.897 66.929,62.865
GND on Top Layer "GND_L01_P227" (solid, pour order 227): 96.266,71.755 96.266,67.056 97.536,65.786 99.06,65.786 99.06,62.23 102.235,62.23 102.743,62.738 102.743,64.643 101.854,65.532 101.854,71.755
GND on Top Layer "GND_L01_P226" (solid, pour order 226): 75.819,71.755 75.819,66.929 76.962,65.786 78.359,65.786 78.359,62.357 81.534,62.357 82.296,63.119 82.296,64.516 81.534,65.278 81.534,71.755
LOAD_7 on Top Layer "LOAD_7_L01_P224" (solid, remove dead copper, pour order 224): 92.456,71.628 93.218,71.628 93.218,60.833 92.456,60.833
LOAD_6 on Top Layer "LOAD_6_L01_P216" (solid, remove dead copper, pour order 216): 72.009,71.501 72.771,71.501 72.771,60.96 72.009,60.96
GND on Top Layer "GND_L01_P208" (solid, pour order 208): 49.657,74.295 50.419,74.295 50.8,73.914 50.8,72.517 52.197,72.517 52.197,74.168 53.467,75.438 53.467,76.2 53.213,76.454 50.419,76.454 49.657,75.692
GND on Top Layer "GND_L01_P210" (solid, remove dead copper, pour order 210): 41.021,68.58 43.434,68.58 43.434,70.739 41.021,70.739 40.64,70.358 40.64,68.961
LOAD_5 on Top Layer "LOAD_5_L01_P206" (solid, remove dead copper, pour order 206): 50.8,71.755 50.8,61.976 51.562,61.976 51.562,71.755
LOAD_5 on Top Layer "LOAD_5_L01_P205" (solid, pour order 205): 42.164,62.865 41.021,61.722 41.021,55.499 46.99,49.53 61.087,49.53 61.722,50.165 61.722,60.833 61.468,61.087 56.642,61.087 56.642,65.024 45.72,65.024 45.72,62.865
24Vin on Top Layer "24VIN_L01_P169" (solid, pour order 169): 45.815,87.86 45.815,89.281 59.817,89.281 59.817,84.455 59.055,83.693 48.895,83.693
NetC8_2 on Top Layer "NETC8_2_L01_P173" (solid, remove dead copper, pour order 173): 18.923,87.142 18.923,88.646 20.828,88.646 22.86,90.678 22.86,91.694 27.305,91.694 30.988,88.011 43.561,88.011 43.561,85.09 40.005,81.534 27.119,81.534
NetC8_1 on Top Layer "NETC8_1_L01_P174" (solid, remove dead copper, pour order 174): 43.879,84.963 43.879,88.011 47.498,88.011 47.498,86.995 45.5,84.963
GND on Top Layer "GND_L01_P204" (solid, remove dead copper, pour order 204): 54.61,71.755 54.61,66.802 55.626,65.786 57.531,65.786 57.531,62.23 61.087,62.23 61.595,62.738 61.595,64.389 60.579,65.405 60.579,71.755
NetBMS1_7 on Top Layer "NETBMS1_7_L01_P138" (solid, remove dead copper, pour order 138): 32.766,157.861 21.876,139.033 33.655,127.254 37.592,127.254 37.592,157.861
24Vin on Top Layer "24VIN_L01_P168" (solid, pour order 168): 13.589,98.806 13.208,98.425 13.208,96.393 13.716,95.885 15.234,95.885 19.026,91.694 22.098,91.694 22.098,98.298 21.59,98.806
GND on Top Layer "GND_L01_P145" (solid, remove dead copper, pour order 145): 21.59,137.795 29.083,130.302 29.083,125.857 29.083,122.428 21.35,122.428 19.995,120.904 13.208,120.904 13.208,122.518 19.563,137.795
NetC3_1 on Top Layer "NETC3_1_L01_P156" (solid, pour order 156): 11.049,114.046 11.049,99.314 20.036,99.314 27.813,106.689 27.813,114.046
NetBMS1_8 on Top Layer "NETBMS1_8_L01_P146" (solid, remove dead copper, pour order 146): 42.418,139.7 42.418,140.843 39.116,140.843 38.354,140.081 38.354,133.858 43.942,133.858 43.942,134.803 40.64,137.922
NetBMS1_7 on Top Layer "NETBMS1_7_L01_P167" (solid, pour order 167): 34.609,141.605 45.085,141.605 45.085,157.607 34.735,157.607
NetBMS1_4 on Top Layer "NETBMS1_4_L01_P140" (solid, remove dead copper, pour order 140): 44.208,135.128 41.021,138.176 41.021,139.065 41.275,139.319 43.815,139.319 44.069,139.065 44.069,138.303 45.085,137.414 45.466,137.033 45.466,135.128
GND on GND Plane "GND_L02_P166" (solid, remove dead copper, pour order 166): 32.639,157.226 22.715,140.173 14.732,118.259 14.732,66.76 37.812,33.147 151.638,33.147 157.861,35.821 157.861,154.432 155.194,157.099
5V on GND Plane "5V_L02_P189" (solid, remove dead copper, pour order 189): 43.942,100.746 43.942,95.25 61.595,95.25 61.595,100.851
CHASSIS on GND Plane "chassis" (solid, pour order 283): 157.861,124.46 145.161,124.46 145.161,84.455 145.034,84.328 157.861,84.328
STM32VDD on Bottom Layer "STM32VDD_L04_P291" (solid, pour order 291): 73.914,109.982 75.311,109.982 75.692,109.601 75.692,106.299 66.548,97.155 66.548,86.36 65.786,85.598 64.389,85.598 63.754,86.233 63.754,102.997 66.548,105.791 66.548,109.347 67.056,109.982
NetIC7_17 on Bottom Layer "NETIC7_17_L04_P161" (solid, remove dead copper, pour order 161): 41.656,102.235 43.434,104.013 43.434,120.396 50.546,120.396 51.181,121.031 51.181,124.968 50.673,125.476 37.465,125.476 32.258,120.269 32.258,102.997 33.02,102.235
REG_SUPPLY_5V on Bottom Layer "REG_SUPPLY_5V_L04_P184" (solid, pour order 184): 23.876,101.092 23.876,98.552 28.829,93.599 41.021,93.599 42.545,95.123 42.545,101.092
NetBMS1_8 on Bottom Layer "NETBMS1_8_L04_P185" (solid, pour order 185): 53.848,126.873 52.197,125.222 52.197,120.904 62.992,120.904 62.992,122.936 59.055,126.873
NetC10_1 on Bottom Layer "NETC10_1_L04_P186" (solid, pour order 186): 49.276,110.775 49.276,105.664 50.546,104.394 64.516,104.394 65.532,105.41 65.532,117.348 52.509,117.463
5V on Bottom Layer "5V_L04_P187" (solid, remove dead copper, pour order 187): 43.561,94.742 44.704,93.599 62.23,93.599 62.23,99.695 60.071,101.854 45.72,101.854 43.561,99.695
LOAD_7 on Bottom Layer "LOAD_7_L04_P301" (solid, pour order 301): 95.504,51.943 95.504,49.784 103.505,41.783 106.045,41.783 107.188,42.926 107.188,46.355 101.6,51.943 100.838,51.943
LOAD_6 on Bottom Layer "LOAD_6_L04_P299" (solid, pour order 299): 62.865,50.673 62.865,44.069 64.897,42.037 69.215,42.037 69.977,42.799 69.977,50.673
LOAD_5 on Bottom Layer "LOAD_5_L04_P298" (solid, pour order 298): 44.831,47.561 44.831,53.149 54.991,53.149 54.991,42.355 54.61,41.974 50.419,41.974 44.704,47.688
NetBMS1_9 on Bottom Layer "NETBMS1_9_L04_P164" (solid, remove dead copper, pour order 164): 44.958,157.607 44.958,130.81 64.897,130.81 64.897,157.607 52.07,157.607 51.816,157.607
24Vin on Bottom Layer "24VIN_L04_P292" (solid, pour order 292): 37.719,42.736 37.719,33.274 155.194,33.274 161.544,39.624 161.544,42.863
24Vin on Bottom Layer "24VIN_L04_P229" (solid, remove dead copper, pour order 229): 83.693,63.373 83.525,63.541 83.525,71.333 85.471,73.279 89.281,73.279 89.662,72.898 89.662,65.659 87.63,65.659 87.249,65.278 87.249,63.373
24Vin on Bottom Layer "24VIN_L04_P213" (solid, pour order 213): 42.418,74.803 41.91,74.295 41.91,63.881 42.418,63.373 45.339,63.373 45.339,65.278 45.72,65.659 47.752,65.659 48.26,66.167 48.26,73.914 47.371,74.803
24Vin on Bottom Layer "24VIN_L04_P225" (solid, remove dead copper, pour order 225): 66.548,63.373 63.119,63.373 62.865,63.627 62.865,71.374 64.77,73.279 68.58,73.279 68.961,72.898 68.961,65.659 66.929,65.659 66.548,65.278
24Vin on Bottom Layer "24VIN_L04_P183" (solid, pour order 183): 14.253,101.375 12.954,100.076 12.954,83.693 57.658,83.693 61.722,87.757 61.722,92.202 61.214,92.71 28.448,92.71 19.841,101.317
24Vin on Bottom Layer "24VIN_L04_P263" (solid, remove dead copper, pour order 263): 139.065,61.214 144.272,61.214 144.272,64.77 139.446,64.77 138.811,64.135 138.811,61.595
GND on Bottom Layer "GND_L04_P267" (solid, remove dead copper, pour order 267): 136.017,63.881 137.668,63.881 137.795,63.754 137.795,62.23 137.541,61.976 136.017,61.976 135.509,62.484 135.509,63.373
LOAD_4 on Bottom Layer "LOAD_4_L04_P271" (solid, pour order 271): 138.049,63.627 138.557,63.627 138.557,60.325 142.621,56.261 142.621,49.53 135.255,49.53 135.255,59.563 137.414,61.722 138.049,61.722
24Vin on Bottom Layer "24VIN_L04_P262" (solid, remove dead copper, pour order 262): 128.905,61.214 134.112,61.214 134.112,64.77 129.286,64.77 128.651,64.135 128.651,61.595
GND on Bottom Layer "GND_L04_P266" (solid, remove dead copper, pour order 266): 125.857,63.881 127.508,63.881 127.635,63.754 127.635,62.23 127.381,61.976 125.857,61.976 125.349,62.484 125.349,63.373
LOAD_3 on Bottom Layer "LOAD_3_L04_P270" (solid, pour order 270): 127.889,63.627 128.397,63.627 128.397,60.325 132.461,56.261 132.461,49.53 125.095,49.53 125.095,59.563 127.254,61.722 127.889,61.722
24Vin on Bottom Layer "24VIN_L04_P261" (solid, remove dead copper, pour order 261): 118.745,61.214 123.952,61.214 123.952,64.77 119.126,64.77 118.491,64.135 118.491,61.595
GND on Bottom Layer "GND_L04_P265" (solid, remove dead copper, pour order 265): 115.697,63.881 117.348,63.881 117.475,63.754 117.475,62.23 117.221,61.976 115.697,61.976 115.189,62.484 115.189,63.373
LOAD_2 on Bottom Layer "LOAD_2_L04_P269" (solid, pour order 269): 117.729,63.627 118.237,63.627 118.237,60.325 122.301,56.261 122.301,49.784 114.935,49.784 114.935,59.563 117.094,61.722 117.729,61.722
LOAD_1 on Bottom Layer "LOAD_1_L04_P268" (solid, pour order 268): 107.569,63.627 108.077,63.627 108.077,60.325 112.141,56.261 112.141,49.784 104.775,49.784 104.775,59.563 106.934,61.722 107.569,61.722
GND on Bottom Layer "GND_L04_P264" (solid, remove dead copper, pour order 264): 105.537,63.881 107.188,63.881 107.315,63.754 107.315,62.23 107.061,61.976 105.537,61.976 105.029,62.484 105.029,63.373
24Vin on Bottom Layer "24VIN_L04_P260" (solid, remove dead copper, pour order 260): 108.585,61.214 113.792,61.214 113.792,64.77 108.966,64.77 108.331,64.135 108.331,61.595
GND on Bottom Layer "GND_L04_P230" (solid, remove dead copper, pour order 230): 96.266,71.755 96.266,67.056 97.536,65.786 99.06,65.786 99.06,62.357 99.187,62.23 102.362,62.23 102.87,62.738 102.87,64.516 101.854,65.532 101.854,71.755
GND on Bottom Layer "GND_L04_P228" (solid, pour order 228): 75.819,71.755 75.819,66.929 76.962,65.786 78.359,65.786 78.359,62.357 81.661,62.357 82.296,62.992 82.296,64.516 81.534,65.278 81.534,71.755
LOAD_7 on Bottom Layer "LOAD_7_L04_P223" (solid, remove dead copper, pour order 223): 87.576,62.865 84.147,62.865 83.512,62.23 83.512,50.292 84.274,49.53 102.562,49.53 103.197,50.165 103.197,60.706 102.943,60.96 98.298,60.96 98.298,64.897 87.576,64.897
LOAD_6 on Bottom Layer "LOAD_6_L04_P222" (solid, pour order 222): 63.373,62.865 62.865,62.357 62.865,50.165 63.5,49.53 81.788,49.53 82.55,50.292 82.55,60.833 82.296,61.087 77.851,61.087 77.851,64.897 66.929,64.897 66.929,62.865
GND on Bottom Layer "GND_L04_P212" (solid, remove dead copper, pour order 212): 54.61,71.755 54.61,66.802 55.626,65.786 57.531,65.786 57.531,63.373 58.674,62.23 61.087,62.23 61.595,62.738 61.595,64.389 60.579,65.405 60.579,71.755
24Vin on Bottom Layer "24VIN_L04_P211" (solid, remove dead copper, pour order 211): 12.954,84.455 12.954,73.406 25.273,61.087 34.163,61.087 38.354,65.278 38.354,84.328
LOAD_5 on Bottom Layer "LOAD_5_L04_P207" (solid, pour order 207): 45.72,62.865 42.164,62.865 41.021,61.722 41.021,50.038 41.529,49.53 61.087,49.53 61.722,50.165 61.722,61.087 56.642,61.087 56.642,65.024 45.72,65.024
NetC3_1 on Bottom Layer "NETC3_1_L04_P177" (solid, remove dead copper, pour order 177): 19.685,127 12.446,117.348 12.446,103.632 13.843,102.235 31.242,102.235 32.004,102.997 32.004,120.904 37.719,126.619 37.719,127
NetBMS1_7 on Bottom Layer "NETBMS1_7_L04_P163" (solid, remove dead copper, pour order 163): 32.512,157.607 19.431,137.795 19.431,129.667 20.828,127.762 43.612,127.762 43.766,156.894 43.053,157.607
NetBMS1_8 on Bottom Layer "NETBMS1_8_L04_P148" (solid, pour order 148): 39.243,140.589 38.735,140.081 38.735,127.508 43.18,127.508 43.561,127.889 43.561,139.827 42.799,140.589
5V on PWR Plane "5V_L03_P288" (solid, remove dead copper, pour order 288): 48.006,96.139 48.006,106.426 67.31,125.73 67.31,155.067 69.469,157.226 151.13,157.226 152.908,155.448 152.908,147.066 151.003,145.161 84.836,145.161 84.836,129.921 63.881,108.966 63.881,106.426 61.595,104.14 61.595,96.139
REG_SUPPLY_5V on PWR Plane "REG_SUPPLY_5V_L03_P279" (solid, remove dead copper, pour order 279): 27.559,99.568 27.686,99.695 35.179,99.695 35.56,100.076 42.799,100.076 42.799,95.631 43.561,94.869 61.595,94.869 62.103,95.377 62.103,103.505 62.738,104.14 72.263,104.14 74.422,101.981 74.422,91.186 73.787,90.551 30.226,90.551 27.559,93.218
5V on PWR Plane "5V_L03_P293" (solid, remove dead copper, pour order 293): 75.819,122.301 120.015,122.301 120.015,125.349 119.634,125.73 75.819,125.73
STM32VDD on PWR Plane "STM32VDD_L03_P295" (solid, remove dead copper, pour order 295): 73.406,116.078 73.406,104.394 76.2,101.6 76.2,84.201 140.208,84.201 152.527,96.52 152.527,116.218
STM32VDD on PWR Plane "STM32VDD_L03_P200" (solid, pour order 200): 145.923,112.395 145.923,89.789 52.197,89.789 66.167,75.819 160.528,75.819 160.528,112.395
NetDQ1_2 on PWR Plane "NETDQ1_2_L03_P165" (solid, remove dead copper, pour order 165): 59.563,139.192 58.547,138.176 58.547,125.603 59.819,124.331 64.26,124.331 65.659,125.73 65.659,139.192
NetBMS1_8 on PWR Plane "NETBMS1_8_L03_P304" (solid, remove dead copper, pour order 304): 37.465,105.918 36.957,106.426 36.957,108.839 38.1,109.982 42.037,109.982 42.037,118.237 42.164,118.11 45.974,118.11 45.974,108.204 44.577,106.807 39.751,106.807 38.862,105.918
NetBMS1_8 on PWR Plane "NETBMS1_8_L03_P190" (solid, remove dead copper, pour order 190): 42.037,129.009 42.037,117.104 53.848,117.104 58.039,121.295 58.039,128.987
NetIC7_17 on PWR Plane "NETIC7_17_L03_P231" (solid, pour order 231): 32.639,116.84 32.639,102.616 35.814,102.616 36.83,103.632 36.83,115.951 35.941,116.84
STM32VDD on PWR Plane "STM32VDD_L03_P294" (solid, remove dead copper, pour order 294): 99.441,136.906 99.441,133.985 100.584,132.842 102.743,132.842 103.378,133.477 103.378,136.906
STM32VDD on PWR Plane "STM32VDD_L03_P302" (solid, remove dead copper, pour order 302): 134.747,144.526 134.747,131.064 139.065,126.746 147.574,126.746 147.574,113.284 153.162,107.696 160.528,107.696 160.528,144.526
24Vin on PWR Plane "24VIN_L03_P232" (solid, remove dead copper, pour order 232): 86.614,68.834 86.995,68.453 86.995,33.782 155.829,33.782 164.084,42.037 164.084,68.834
NetC3_1 on PWR Plane "NETC3_1_L03_P202" (solid, remove dead copper, pour order 202): 18.034,129.159 32.131,129.159 32.131,110.871 18.923,97.663 11.049,105.537 11.049,115.398
24Vin on PWR Plane "24VIN_L03_P199" (solid, pour order 199): 37.973,87.63 35.433,85.09 35.433,74.803 76.454,33.782 102.997,33.782 102.997,74.803 65.278,74.803 52.251,87.63
STM32VDD on PWR Plane "STM32VDD_L03_P193" (solid, remove dead copper, pour order 193): 160.528,148.59 155.575,148.59 151.511,144.526 99.441,144.526 99.441,135.001 160.528,135.001
NetBMS1_7 on PWR Plane "NETBMS1_7_L03_P188" (solid, remove dead copper, pour order 188): 32.766,156.845 18.542,130.194 18.542,129.794 44.577,129.794 44.577,156.845
NetC3_1 on PWR Plane "NETC3_1_L03_P176" (solid, remove dead copper, pour order 176): 21.209,129.159 17.972,129.159 11.049,115.547 11.049,76.453 32.864,35.019 70.14,35.019 21.209,85.427 21.209,98.143
NetBMS1_9 on PWR Plane "NETBMS1_9_L03_P137" (solid, remove dead copper, pour order 137): 45.974,157.353 64.389,157.353 64.389,142.369 57.706,129.667 45.974,129.667

## Other copper
GND Plane:
  pour cut-out: 157.861,127.127 142.113,127.127 142.113,81.661 157.861,81.661 157.861,83.693 145.161,83.693 145.161,124.46 157.861,124.46

## Silkscreen, mask and mechanical layers (free items; w line width, h text height)
Top Overlay:
  drawing of 25 lines, arcs and shapes, not listed
  text "TO DO: Pour bottom layer copper after routing for STM32VDD" at 99.06,152.273 h1.52
  text "Tiphys 1 Rev1" at 12.368,75.865 h2 r90
  text "Argo Flight Computer" at 15.643,65.705 h1.7 r90
  text "Percy27@bu.edu" at 18.796,61.849 h1.52 r90
  text "P.Chen" at 20.955,61.722 h1.52 r90
  text "G.Gautel" at 23.114,61.722 h1.52 r90
  text "K.Suglobova" at 25.146,61.722 h1.52 r90
Bottom Overlay:
  drawing of 7 lines, arcs and shapes, not listed
Mechanical 1:
  lines w0.025: 32,32.39 159,32.39
  text "Remove this after most layout work finished and pouring GND plane at GND LAYER" at -24.265,186.443 h5
  text "ToDo: Move down the 2 ADC Dsub by 1.5mm after expand ADC module layout" at 50.673,160.813 h2
  text "add Via stitiches to NETC3_2" at -24.511,115.443 h1.52
  text "Add Etherent Breakout" at 114.427,95.25 h1.2 r90

## Text inside footprints (layer, text, board x,y; h text height)
J1: Top Overlay "9" at 159.23,71.833 h1.02 r90
JADC1: Top Overlay "25" at 100.549,148.1 h1.02
JADC2: Top Overlay "25" at 154.046,148.1 h1.02
JPyro1: Top Overlay "25" at 82.98,42.6 h1.02
JValve1: Top Overlay "25" at 136.38,42.6 h1.02